# EAGLE board pic32 (EAGLE 5.12)
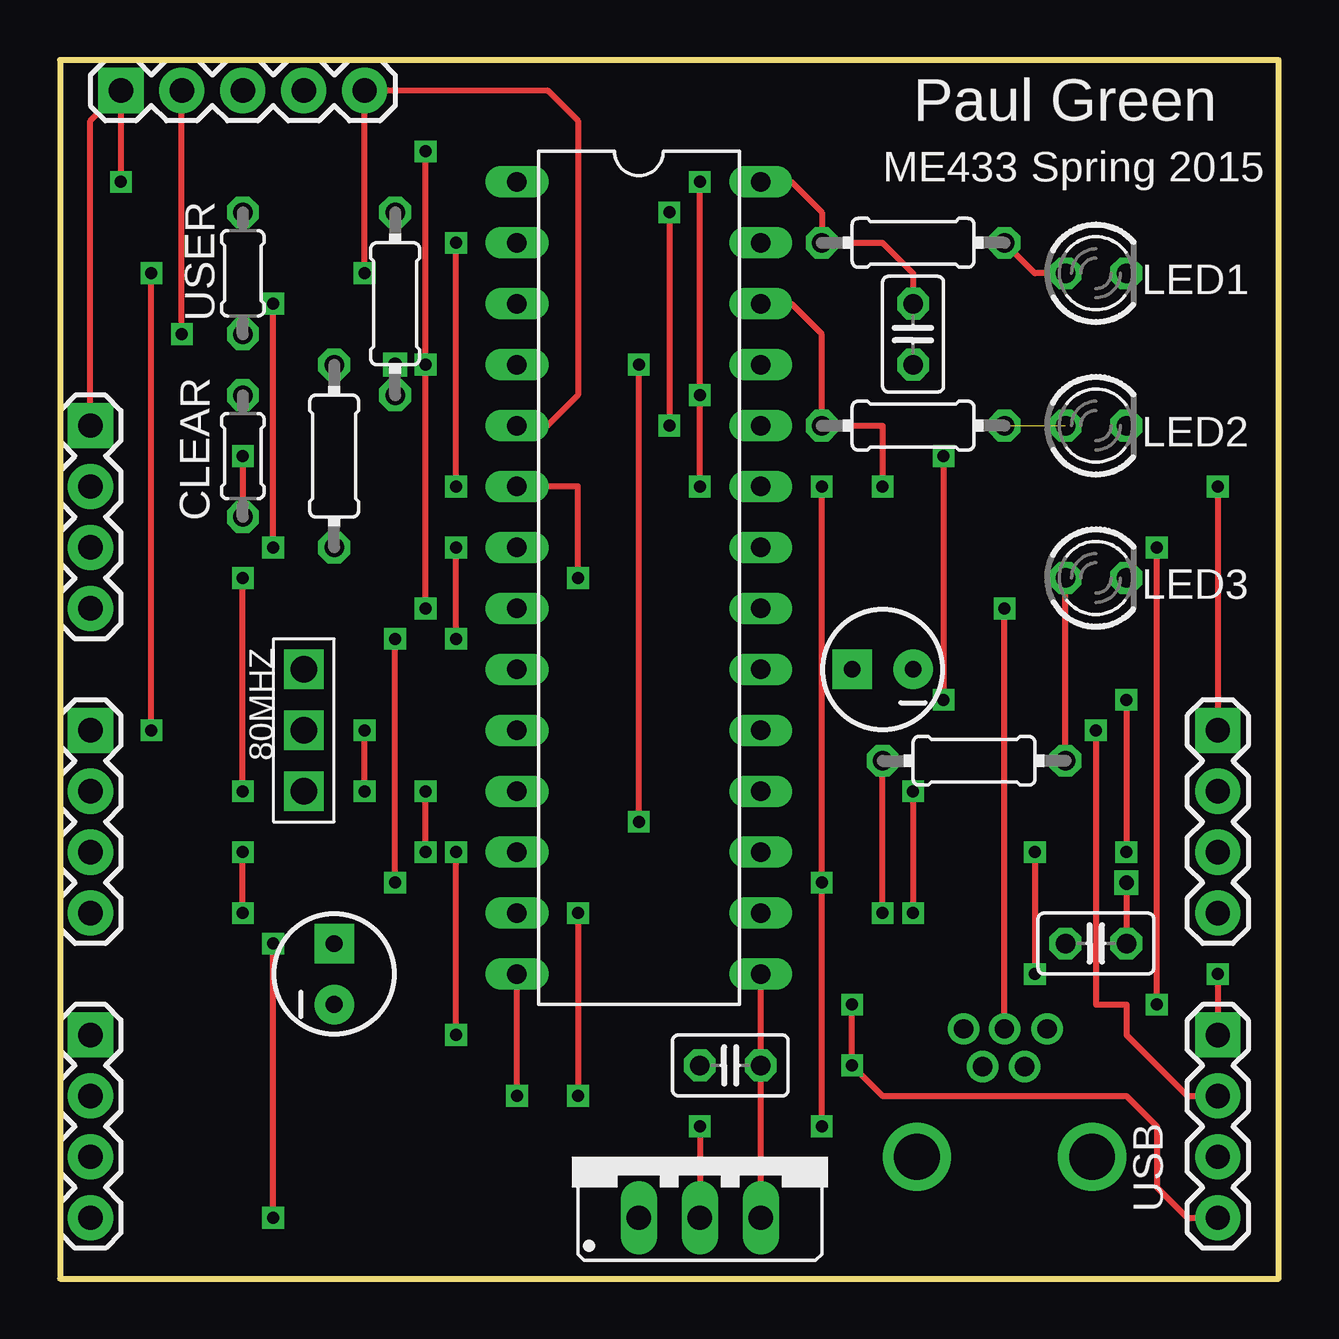
[diagram p0: board, top side]
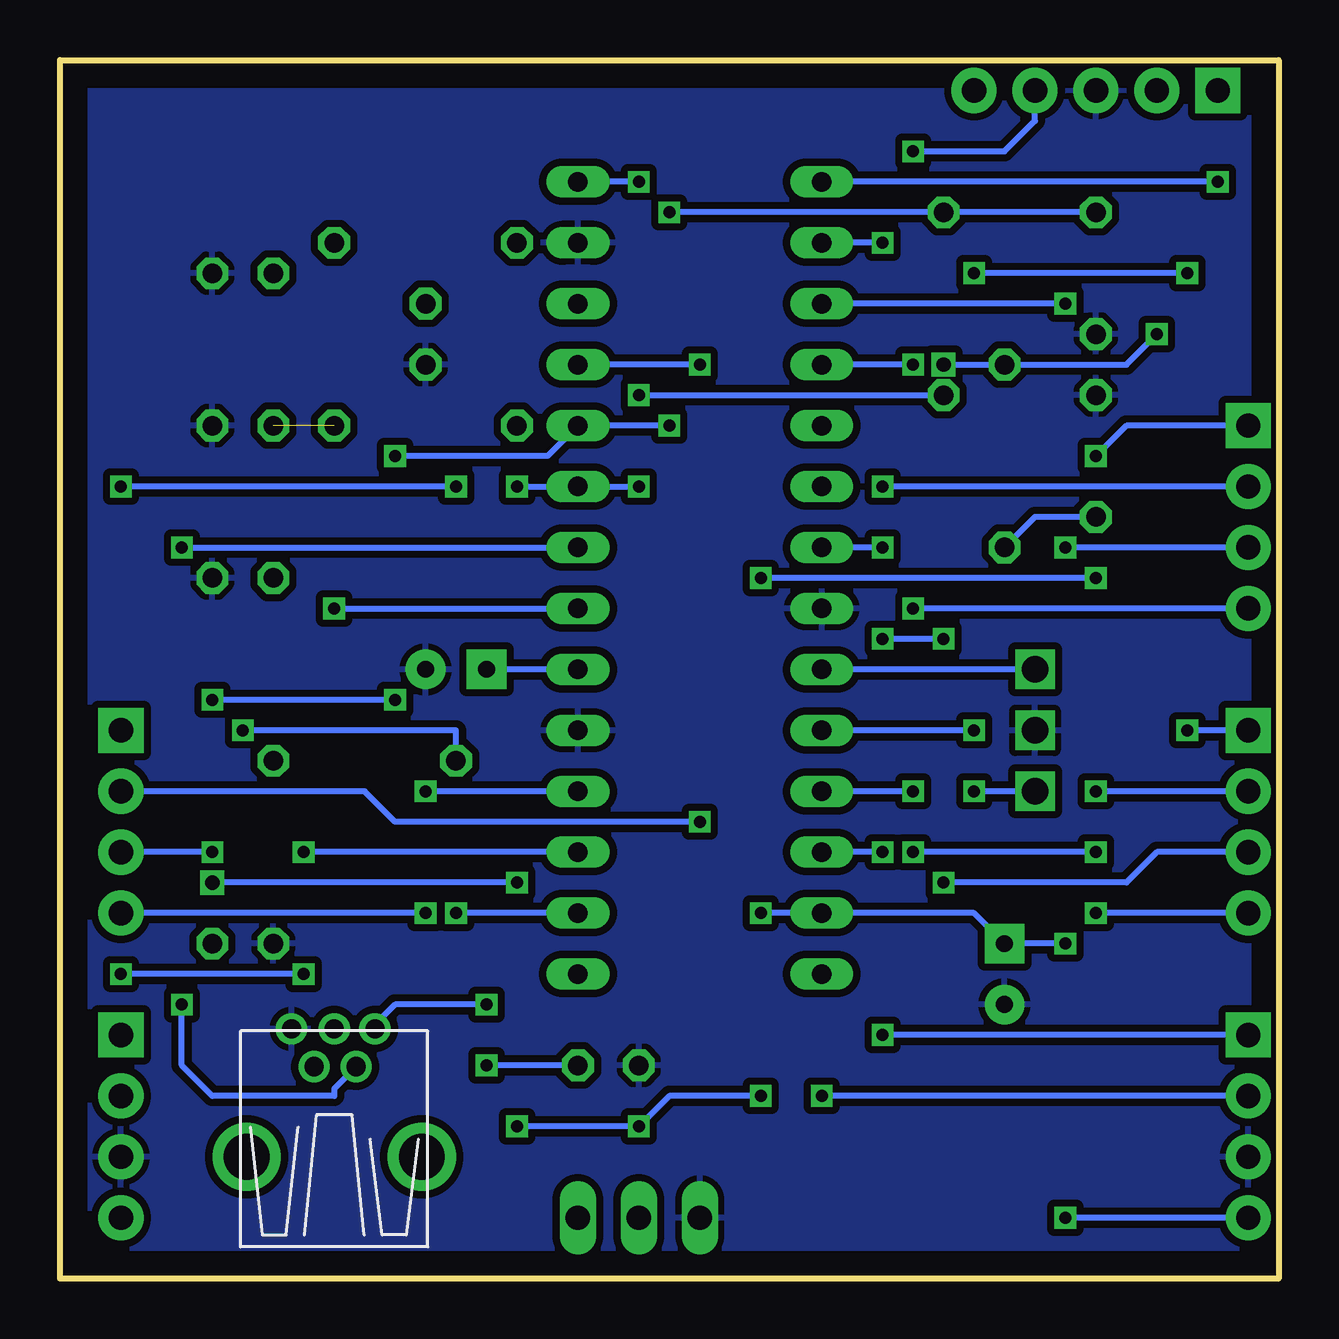
[diagram p1: board, bottom side, seen from below]

Size 50.8 x 50.8 mm. Coordinates in mm from the lower left corner, seen from the top.
Outline: 0,0 50.8,0 50.8,50.8 0,50.8 0,0
Copper layers (1*16): Top 0.035mm / dielectric 1.5mm / Bottom 0.035mm
Design rules "default": minimum track width 10mil, minimum drill 24mil, track to track 8mil, track to pad 8mil, pad to pad 8mil, via to via 8mil, smd to smd 8mil, copper to edge 40mil, drill to drill 8mil, minimum pad ring 10mil, minimum via ring 8mil, stop-mask expansion 4mil, vias tented up to drill 0mil, thermal gap 10mil

## Footprints (pad centres in the part's own frame; a part is rotated, then mirrored left to right if it is on the bottom)
RESONATOR = drill 1.1 square: 1 -2.54,0; 2.CENTER 0,0; 3 2.54,0
C025-025X050 = drill 0.813 octagon: 1 -1.27,0; 2 1.27,0
0204/5 = drill 0.813 octagon: 1 -2.54,0; 2 2.54,0
LED3MM = drill 0.813 octagon: A -1.27,0; K 1.27,0
0204/7 = drill 0.813 octagon: 1 -3.81,0; 2 3.81,0
DIL28-4 = drill 0.813 long: 1 -16.51,-5.08; 2 -13.97,-5.08; 3 -11.43,-5.08; 4 -8.89,-5.08; 5 -6.35,-5.08; 6 -3.81,-5.08; 7 -1.27,-5.08; 8 1.27,-5.08; 9 3.81,-5.08; 10 6.35,-5.08; 11 8.89,-5.08; 12 11.43,-5.08; 13 13.97,-5.08; 14 16.51,-5.08; 15 16.51,5.08; 16 13.97,5.08; 17 11.43,5.08; 18 8.89,5.08; 19 6.35,5.08; 20 3.81,5.08; 21 1.27,5.08; 22 -1.27,5.08; 23 -3.81,5.08; 24 -6.35,5.08; 25 -8.89,5.08; 26 -11.43,5.08; 27 -13.97,5.08; 28 -16.51,5.08
CAP_POL_D = drill 0.7 pad 1.651 square: 1 1.27,0 | drill 0.7 pad 1.651 round: 2 -1.27,0
TO220 = drill 1.016 long: 1 -2.54,0; 2 0,0; 3 2.54,0
USB-MINIB = drill 0.8 round: D+ 4.064,0; D- 2.489,0.914; GND 4.064,-1.778; ID 2.489,-0.838; VBUS 4.064,1.702 | drill 1.9 round: P$6 -1.27,-3.65; P$7 -1.27,3.65
1X05 = drill 1.016 pad 1.88 square: 1 0,0 | drill 1.016 pad 1.88 round: 2 2.54,0; 3 5.08,0; 4 7.62,0; 5 10.16,0
1X04 = drill 1.016 pad 1.88 square: 1 0,0 | drill 1.016 pad 1.88 round: 2 2.54,0; 3 5.08,0; 4 7.62,0

## Placement (x,y rotation side)
80MHZ  RESONATORRESONATOR  [RESONATOR]  10.16,22.86 90 top
C1  0.1uF  [C025-025X050]  35.56,39.37 270 top
C2  0.1uF  [C025-025X050]  27.94,8.89 180 top
C3  0.1uF  [C025-025X050]  43.18,13.97 180 top
CLEAR  BUTTONBUTTON  [0204/5]  7.62,34.29 270 top
LED1  [LED3MM]  43.18,41.91 0 top
LED2  [LED3MM]  43.18,35.56 0 top
LED3  [LED3MM]  43.18,29.21 0 top
R1  10k  [0204/7]  11.43,34.29 90 top
R2  10k  [0204/7]  13.97,40.64 270 top
R3  330  [0204/7]  35.56,43.18 180 top
R4  330  [0204/7]  35.56,35.56 180 top
R5  330  [0204/7]  38.1,21.59 180 top
U$1  PIC32MX250F128B  [DIL28-4]  24.13,29.21 270 top
U$5  10uF  [CAP_POL_D]  34.29,25.4 180 top
U$7  LD1117  [TO220]  26.67,2.54 0 top
U$9  10uF  [CAP_POL_D]  11.43,12.7 90 top
U$10  USB  [USB-MINIB]  39.37,6.35 90 top
U$12  PICkit3  [1X05]  2.54,49.53 0 top
U$13  1X04_HEADER  [1X04]  48.26,22.86 270 top
U$14  1X04_HEADER  [1X04]  48.26,10.16 270 top
U$15  1X04_HEADER  [1X04]  1.27,22.86 270 top
U$16  1X04_HEADER  [1X04]  1.27,10.16 270 top
U$17  1X04_HEADER  [1X04]  1.27,35.56 270 top
USER  BUTTONBUTTON  [0204/5]  7.62,41.91 90 top

## Library data of the parts
80MHZ C1-C3 CLEAR LED1-LED3 R1-R5 U$1 U$5 U$7 U$9 U$10 U$12-U$17 USER = ME433

## Nets
3.3V: C1.1 C3.1 R1.2 R2.2 R3.2 U$1.13 U$1.23 U$1.28 U$7.2 U$9.1 U$12.2 U$16.4
5V: C2.1 U$1.15 U$7.3 U$10.VBUS U$14.4
A0: U$1.2 U$17.2
A1: U$1.3 U$17.3
A4: U$1.12 U$16.1
B0: U$1.4 U$12.4 U$17.4
B1: U$1.5 U$12.5 U$15.1
B2: U$1.6 U$15.2
B3: U$1.7 U$15.3
B4: U$1.11 U$15.4
B5: U$1.14 U$16.2
B7: R5.2 U$1.16 U$14.2
B8: U$1.17 U$14.1
B9: U$1.18 U$13.4
B13: R2.1 U$1.24 U$13.3 USER.2
B14: U$1.25 U$13.2
B15: R4.2 U$1.26 U$13.1
D+: U$1.21 U$10.D+
D-: U$1.22 U$10.D-
GND: 80MHZ.2.CENTER C1.2 C2.2 C3.2 CLEAR.1 LED1.K LED2.K LED3.K U$1.8 U$1.19 U$1.27 U$5.2 U$7.1 U$9.2 U$10.GND U$12.3 U$14.3 U$16.3 USER.1
MCLR: CLEAR.2 R1.1 U$1.1 U$12.1 U$17.1
N$2: 80MHZ.3 U$1.9
N$3: 80MHZ.1 U$1.10
N$4: U$1.20 U$5.1
N$8: LED1.A R3.1
N$9: LED2.A R4.1
N$10: LED3.A R5.1

## Tracks (layer width: path | path; a pad name or v marks a point on that pad's centre or on a via)
3.3V  (via drill 0.5, 0.6)
  Top 0.254: v5.08,39.37 U$12.2 | v8.89,2.54 v8.89,13.97 | R2.2 v13.97,38.1 | v26.67,6.35 U$7.2 | v31.75,6.35 v31.75,16.51 v31.75,33.02 | v44.45,16.51 C3.1 | v21.59,15.24 v21.59,7.62 | v26.67,33.02 v26.67,36.83 v26.67,45.72 | U$1.28 30.48,45.72 31.75,44.45 R3.2 34.29,43.18 35.56,41.91 C1.1
  Bottom 0.254: U$16.4 v8.89,2.54 | v13.97,38.1 R1.2 6.35,38.1 v5.08,39.37 | v31.75,6.35 v26.67,6.35 25.4,7.62 v21.59,7.62 | v31.75,16.51 v44.45,16.51 | v21.59,15.24 U$1.13 12.7,15.24 U$9.1 v8.89,13.97 | v26.67,36.83 R2.2 | v26.67,33.02 U$1.23 v31.75,33.02 | v26.67,45.72 U$1.28
5V  (via drill 0.5)
  Top 0.254: U$7.3 C2.1 U$1.15 | v33.02,11.43 v33.02,8.89 34.29,7.62 44.45,7.62 45.72,6.35 45.72,3.81 46.99,2.54 U$14.4
  Bottom 0.254: C2.1 v33.02,8.89 | v33.02,11.43 36.83,11.43 37.67,10.59 U$10.VBUS
A0  (via drill 0.5)
  Top 0.254: v16.51,33.02 v16.51,43.18
  Bottom 0.254: U$17.2 v16.51,33.02 | v16.51,43.18 U$1.2
A1  (via drill 0.5)
  Top 0.254: v8.89,30.48 v8.89,40.64
  Bottom 0.254: U$17.3 v8.89,30.48 | v8.89,40.64 U$1.3
A4  (via drill 0.5)
  Top 0.254: v16.51,10.16 v16.51,17.78
  Bottom 0.254: U$16.1 v16.51,10.16 | v16.51,17.78 U$1.12
B0  (via drill 0.5)
  Top 0.254: v15.24,27.94 v15.24,38.1 v15.24,46.99
  Bottom 0.254: U$17.4 v15.24,27.94 | v15.24,38.1 U$1.4 | v15.24,46.99 11.43,46.99 10.16,48.26 U$12.4
B1  (via drill 0.5)
  Top 0.254: U$1.5 20.32,35.56 21.59,36.83 21.59,48.26 20.32,49.53 U$12.5 v12.7,41.91 | v3.81,22.86 v3.81,41.91
  Bottom 0.254: U$15.1 v3.81,22.86 | v3.81,41.91 v12.7,41.91
B2  (via drill 0.5)
  Top 0.254: v7.62,20.32 v7.62,29.21 | v21.59,29.21 21.59,33.02 U$1.6
  Bottom 0.254: U$15.2 v7.62,20.32 | v7.62,29.21 v21.59,29.21
B3  (via drill 0.5)
  Top 0.254: v13.97,16.51 v13.97,26.67 | v16.51,26.67 v16.51,30.48
  Bottom 0.254: U$15.3 5.08,17.78 6.35,16.51 v13.97,16.51 | v13.97,26.67 v16.51,26.67 | v16.51,30.48 U$1.7
B4  (via drill 0.5)
  Top 0.254: v7.62,15.24 v7.62,17.78 | v15.24,17.78 v15.24,20.32
  Bottom 0.254: U$15.4 v7.62,15.24 | v7.62,17.78 v15.24,17.78 | v15.24,20.32 U$1.11
B5  (via drill 0.5)
  Top 0.254: v19.05,7.62 U$1.14
  Bottom 0.254: U$16.2 v19.05,7.62
B7  (via drill 0.5)
  Top 0.254: v34.29,15.24 R5.2 | U$14.2 46.99,7.62 44.45,10.16 44.45,11.43 43.18,11.43 v43.18,22.86
  Bottom 0.254: U$1.16 v34.29,15.24 | v43.18,22.86 34.29,22.86 R5.2
B8  (via drill 0.5)
  Top 0.254: v48.26,12.7 U$14.1 | v40.64,17.78 v40.64,12.7
  Bottom 0.254: v40.64,12.7 v48.26,12.7 | U$1.17 v40.64,17.78
B9  (via drill 0.5)
  Top 0.254: v35.56,20.32 v35.56,15.24
  Bottom 0.254: v35.56,15.24 U$13.4 | U$1.18 v35.56,20.32
B13  (via drill 0.5)
  Top 0.254: v25.4,44.45 v25.4,35.56 | v44.45,24.13 v44.45,17.78 | v36.83,34.29 v36.83,24.13
  Bottom 0.254: USER.2 R2.1 v25.4,44.45 | v25.4,35.56 U$1.24 30.48,34.29 v36.83,34.29 | v44.45,17.78 U$13.3 | v36.83,24.13 v44.45,24.13
B14  (via drill 0.5)
  Top 0.254: v24.13,19.05 v24.13,38.1
  Bottom 0.254: U$13.2 38.1,20.32 36.83,19.05 v24.13,19.05 | v24.13,38.1 U$1.25
B15  (via drill 0.5)
  Top 0.254: U$1.26 30.48,40.64 31.75,39.37 R4.2 34.29,35.56 v34.29,33.02 | v48.26,33.02 U$13.1
  Bottom 0.254: v34.29,33.02 v48.26,33.02
D+  (via drill 0.5)
  Top 0.254: U$10.D+ v39.37,27.94
  Bottom 0.254: v39.37,27.94 U$1.21
D-  (via drill 0.5)
  Top 0.254: v45.72,11.43 v45.72,30.48
  Bottom 0.254: U$10.D- 39.37,7.92 39.37,7.62 44.45,7.62 45.72,8.89 v45.72,11.43 | v45.72,30.48 U$1.22
GND
  pour Bottom (isolate 0.305): 0,0 50.8,0 50.8,50.8 0,50.8 0,49.53
MCLR  (via drill 0.5)
  Top 0.254: U$17.1 1.27,48.26 U$12.1 v2.54,45.72 | v7.62,34.29 CLEAR.2
  Bottom 0.254: v2.54,45.72 U$1.1 | CLEAR.2 10.16,31.75 R1.1 | U$17.1 6.35,35.56 v7.62,34.29
N$2
  Bottom 0.254: 80MHZ.3 U$1.9
N$3  (via drill 0.5)
  Top 0.254: v12.7,20.32 v12.7,22.86
  Bottom 0.254: 80MHZ.1 v12.7,20.32 | v12.7,22.86 U$1.10
N$4
  Bottom 0.254: U$1.20 U$5.1
N$8
  Top 0.254: R3.1 40.64,41.91 LED1.A
N$9  (1 unrouted)
N$10
  Top 0.254: R5.1 LED3.A

## Text on the board
tPlace: Paul Green | ME433 Spring 2015